# EAGLE board PIR Shield (EAGLE 6.4)
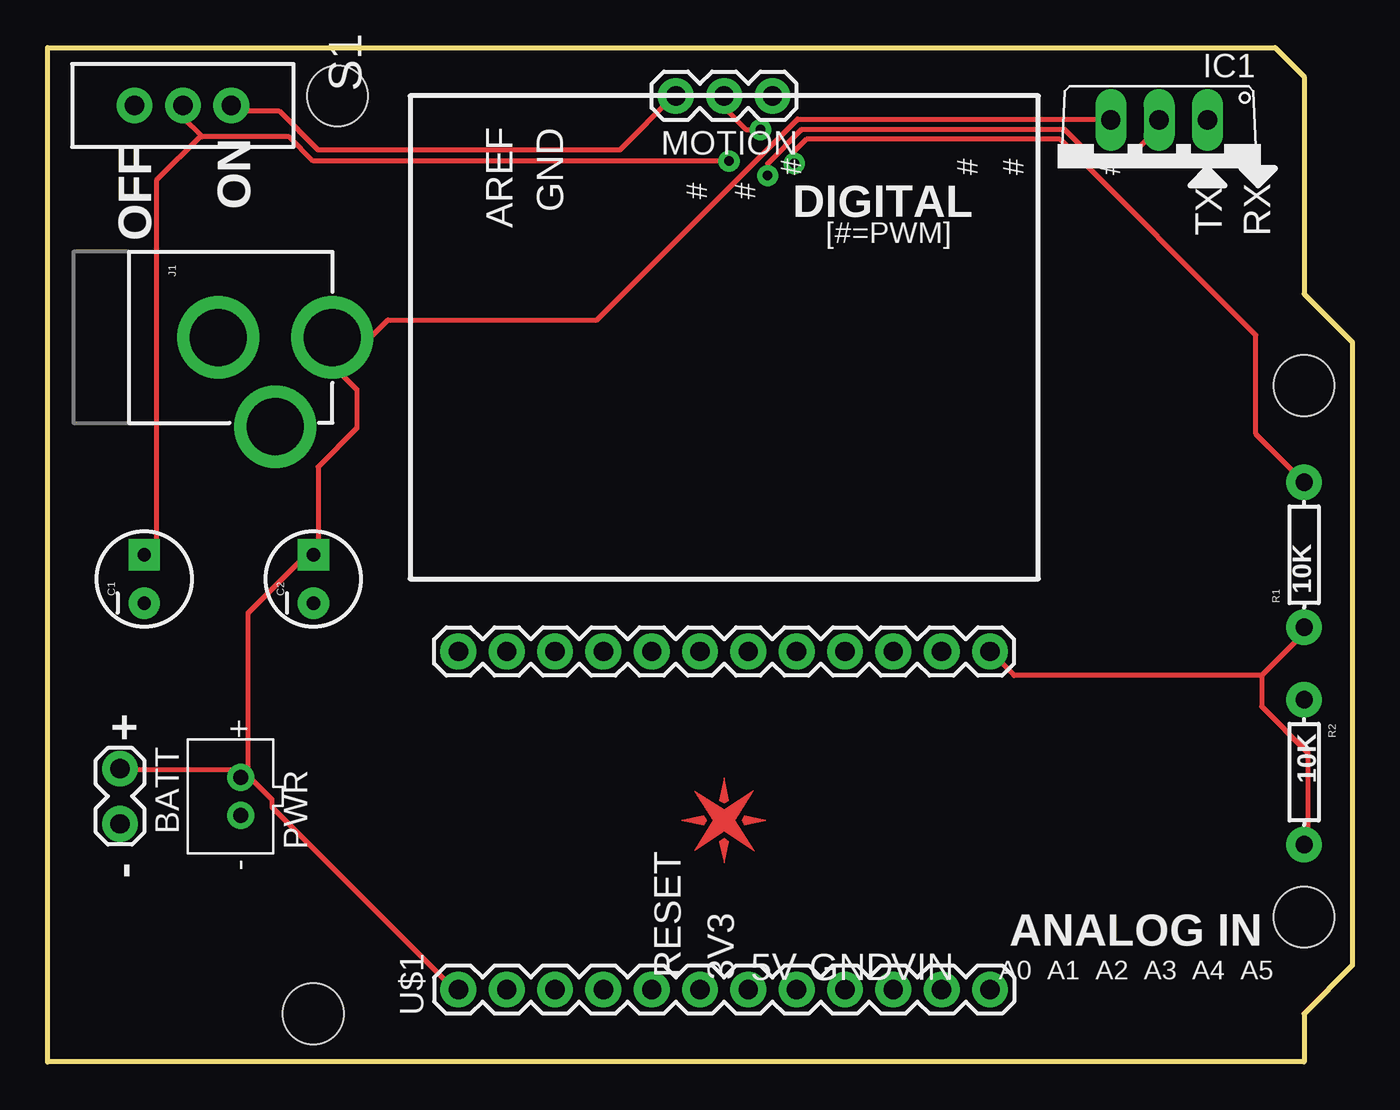
[diagram p0: board, top side]
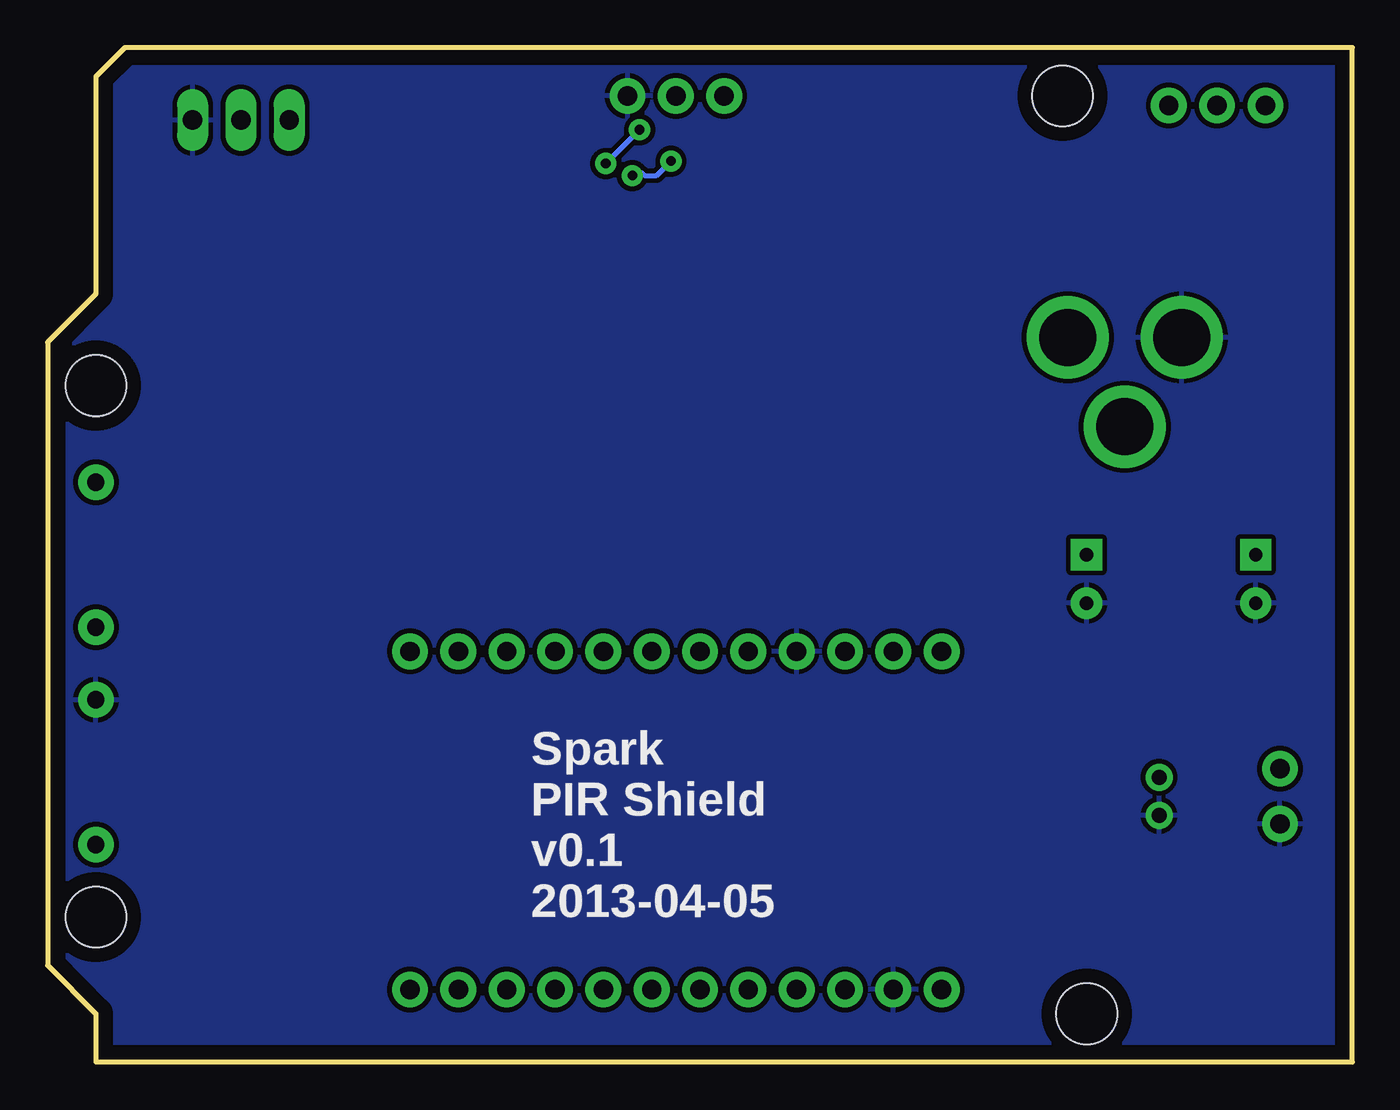
[diagram p1: board, bottom side, seen from below]

Size 68.58 x 53.34 mm. Coordinates in mm from the lower left corner, seen from the top.
Outline: 0,53.34 64.52,53.34 66.04,51.82 66.04,40.39 68.58,37.85 68.58,5.08 66.04,2.54 66.04,0 0,0 0,53.34
Copper layers (1*16): Top 0.035mm / dielectric 1.5mm / Bottom 0.035mm
Design rules "default *": minimum track width 10mil, minimum drill 12mil, track to track 10mil, track to pad 10mil, pad to pad 10mil, via to via 10mil, smd to smd 10mil, copper to edge 30mil, drill to drill 12mil, minimum pad ring 12mil, minimum via ring 12mil, stop-mask expansion 1mil, vias tented up to drill 0mil, thermal gap 10mil
Net classes: 0 default: width 0.152 mm, drill 0.305 mm, clearance 0.152 mm
Holes 3.2 mm at 66.04,35.56 66.04,7.62 15.24,50.8 13.97,2.54
vRestrict: area 47.9,10.3 to 48.5,10.8; area 50.4,10.2 to 50.9,11

## Footprints (pad centres in the part's own frame; a part is rotated, then mirrored left to right if it is on the bottom)
1X02_LOCK = drill 1.016 pad 1.88: 1 -0.178,0; 2 2.718,0
CPOL-RADIAL-10UF-25V = drill 0.7 pad 1.651 square: 1 1.27,0 | drill 0.7 pad 1.651: 2 -1.27,0
TO220V = drill 1.016 long: 1 -2.54,-2.54; 2 0,-2.54; 3 2.54,-2.54
POWER_JACK_PTH = drill 2.997 pad 4.318: GND 0,7.7; GNDBREAK 4.7,10.7; PWR 0,13.7
1X03 = drill 1.016 pad 1.88: 1 0,0; 2 2.54,0; 3 5.08,0
JST-PH-2-THM = drill 0.8 pad 1.422: 1 1,0; 2 -1,0
AXIAL-0.3EZ = drill 0.9 pad 1.88: P$1 -3.81,0; P$2 3.81,0
SWITCH-SPDT = drill 1.016 pad 1.88: 1 0,2.54; 2 0,0; 3 0,-2.54
SPARK_CORE = drill 1.016 pad 1.88: 1 -8.89,13.97; 2 -8.89,11.43; 3 -8.89,8.89; 4 -8.89,6.35; 5 -8.89,3.81; 6 -8.89,1.27; 7 -8.89,-1.27; 8 -8.89,-3.81; 9 -8.89,-6.35; 10 -8.89,-8.89; 11 -8.89,-11.43; 12 -8.89,-13.97; 13 8.89,-13.97; 14 8.89,-11.43; 15 8.89,-8.89; 16 8.89,-6.35; 17 8.89,-3.81; 18 8.89,-1.27; 19 8.89,1.27; 20 8.89,3.81; 21 8.89,6.35; 22 8.89,8.89; 23 8.89,11.43; 24 8.89,13.97

## Placement (x,y rotation side)
BATT  [1X02_LOCK]  3.81,15.24 270 top
C1  10uF  [CPOL-RADIAL-10UF-25V]  5.08,25.4 90 top
C2  1uF  [CPOL-RADIAL-10UF-25V]  13.97,25.4 90 top
IC1  MC33269T-5.0  [TO220V]  58.42,46.99 180 top
J1  POWER_JACKPTH  [POWER_JACK_PTH]  1.27,38.1 270 top
MOTION  [1X03]  38.1,50.8 180 top
PWR  [JST-PH-2-THM]  10.16,13.97 90 top
R1  10K  [AXIAL-0.3EZ]  66.04,26.67 90 top
R2  10K  [AXIAL-0.3EZ]  66.04,15.24 270 top
S1  [SWITCH-SPDT]  7.11,50.29 270 top
U$1  SPARK_CORECORE  [SPARK_CORE]  35.56,12.7 90 top
U$2  [SPARK_LOGO]  1.27,1.27 0 top
U$3  [SPARK_LOGO_PLUS_PLANE]  35.56,12.7 0 top

## Library data of the parts
BATT J1 MOTION = SparkFun-Connectors
C1 C2 = SparkFun-Capacitors
IC1 = linear
PWR = adafruit
R1 R2 = SparkFun-Resistors
S1 = SparkFun-Electromechanical
U$1-U$3 = Spark

## Nets
+3V3: U$1.24
+5V: MOTION.3 S1.1
AD0: U$1.12
AD1: U$1.11
AD2: U$1.6
GND: BATT.2 C1.2 C2.2 IC1.1 J1.GND MOTION.1 PWR.2 R2.P$1 U$1.2 U$1.21
IO0: U$1.4
IO1: U$1.3
IO2: U$1.15
IO3: R1.P$1 R2.P$2 U$1.13
IO4: U$1.16
IO5: U$1.14
IO6: U$1.5
IO7: U$1.17
IO8: U$1.18
IO9: U$1.19
MISO: U$1.8
MOSI: U$1.7
N1: C1.1 IC1.2 S1.2
OUT: MOTION.2 R1.P$2
RESET: U$1.23
SCK: U$1.9
SS: U$1.10
VCC: BATT.1 C2.1 IC1.3 J1.PWR PWR.1 U$1.1
VDDA: U$1.22

## Tracks (layer width: path | path; a pad name or v marks a point on that pad's centre or on a via)
+5V
  Top 0.254: S1.1 9.75,49.99 12.19,49.99 14.22,47.95 30.07,47.95 32.92,50.8 MOTION.3
GND
  pour Bottom (rank 2): 0.64,52.7 67.69,52.7 67.94,52.45 67.94,0.64 0.89,0.64 0.64,0.89 0.64,30.48 0.64,46.35
IO3
  Top 0.254: U$1.13 50.8,20.32 63.8,20.32 | 63.8,20.32 63.8,18.69 66.24,16.26 66.24,11.63 R2.P$2 | 63.8,20.32 66.04,22.55 R1.P$1
N1  (via drill 0.51)
  Top 0.254: S1.2 7.11,49.66 8.06,48.7 | 8.06,48.7 8.13,48.64 12.7,48.64 13.97,47.37 v35.81,47.37 | v37.85,46.61 37.85,47.24 39.62,49.02 53.47,49.02 54.99,47.5 56.77,47.5 58.42,49.15 IC1.2 | 8.06,48.7 5.71,46.35 5.71,27.3 C1.1
  Bottom 0.254: 5.28,26.82 C1.1 | v35.81,47.37 36.58,46.61 37.21,46.61 37.34,46.74 37.72,46.74 v37.85,46.61
OUT  (via drill 0.51)
  Top 0.254: v39.24,47.24 39.24,47.88 39.88,48.51 53.21,48.51 63.5,38.23 63.5,33.02 R1.P$2 | v37.47,49.02 36.7,49.02 35.56,50.16 MOTION.2
  Bottom 0.254: v37.47,49.02 v39.24,47.24
VCC
  Top 0.254: 15.44,38.2 17.07,38.2 17.88,39.01 28.85,39.01 39.42,49.58 55.83,49.58 IC1.3 | 15.44,38.2 15.44,36.17 16.26,35.36 16.26,33.33 14.22,31.29 14.22,26.92 C2.1 | 14.12,26.82 C2.1 | PWR.1 10.27,14.97 10.45,15.15 11.79,13.82 11.79,13.41 21.39,3.81 U$1.1 | 15.44,38.2 15.07,38.2 J1.PWR | C2.1 13.59,26.67 10.54,23.62 10.54,15.24 PWR.1 | BATT.1 3.81,15.37 9.91,15.37 10.16,15.11 PWR.1
  Bottom 0.254: 13.82,26.82 C2.1

## Text on the board
tPlace: ON | OFF | + | -
bPlace: Spark / PIR Shield / v0.1 / 2013-04-05
tNames: AREF | GND | # | # | # | # | # | # | DIGITAL | [#=PWM] | TX | RX | ANALOG IN | RESET | 3V3 | 5V | GND | VIN | A0 | A1 | A2 | A3 | A4 | A5
214bmp: D:/SmartProjects/Snc/a4_bn_logo2.bmp